# Altium PCB WCH_TOUCH_Kit_EX001.PcbDoc
Units mil, origin at the board's own origin, x right, y up, seen from the top; angles counter-clockwise.
Board outline 2599.76 x 3002.87 mil, 2 copper layers (Top Layer, Bottom Layer); 30 components, 23 nets, 94 pads, 43 vias.
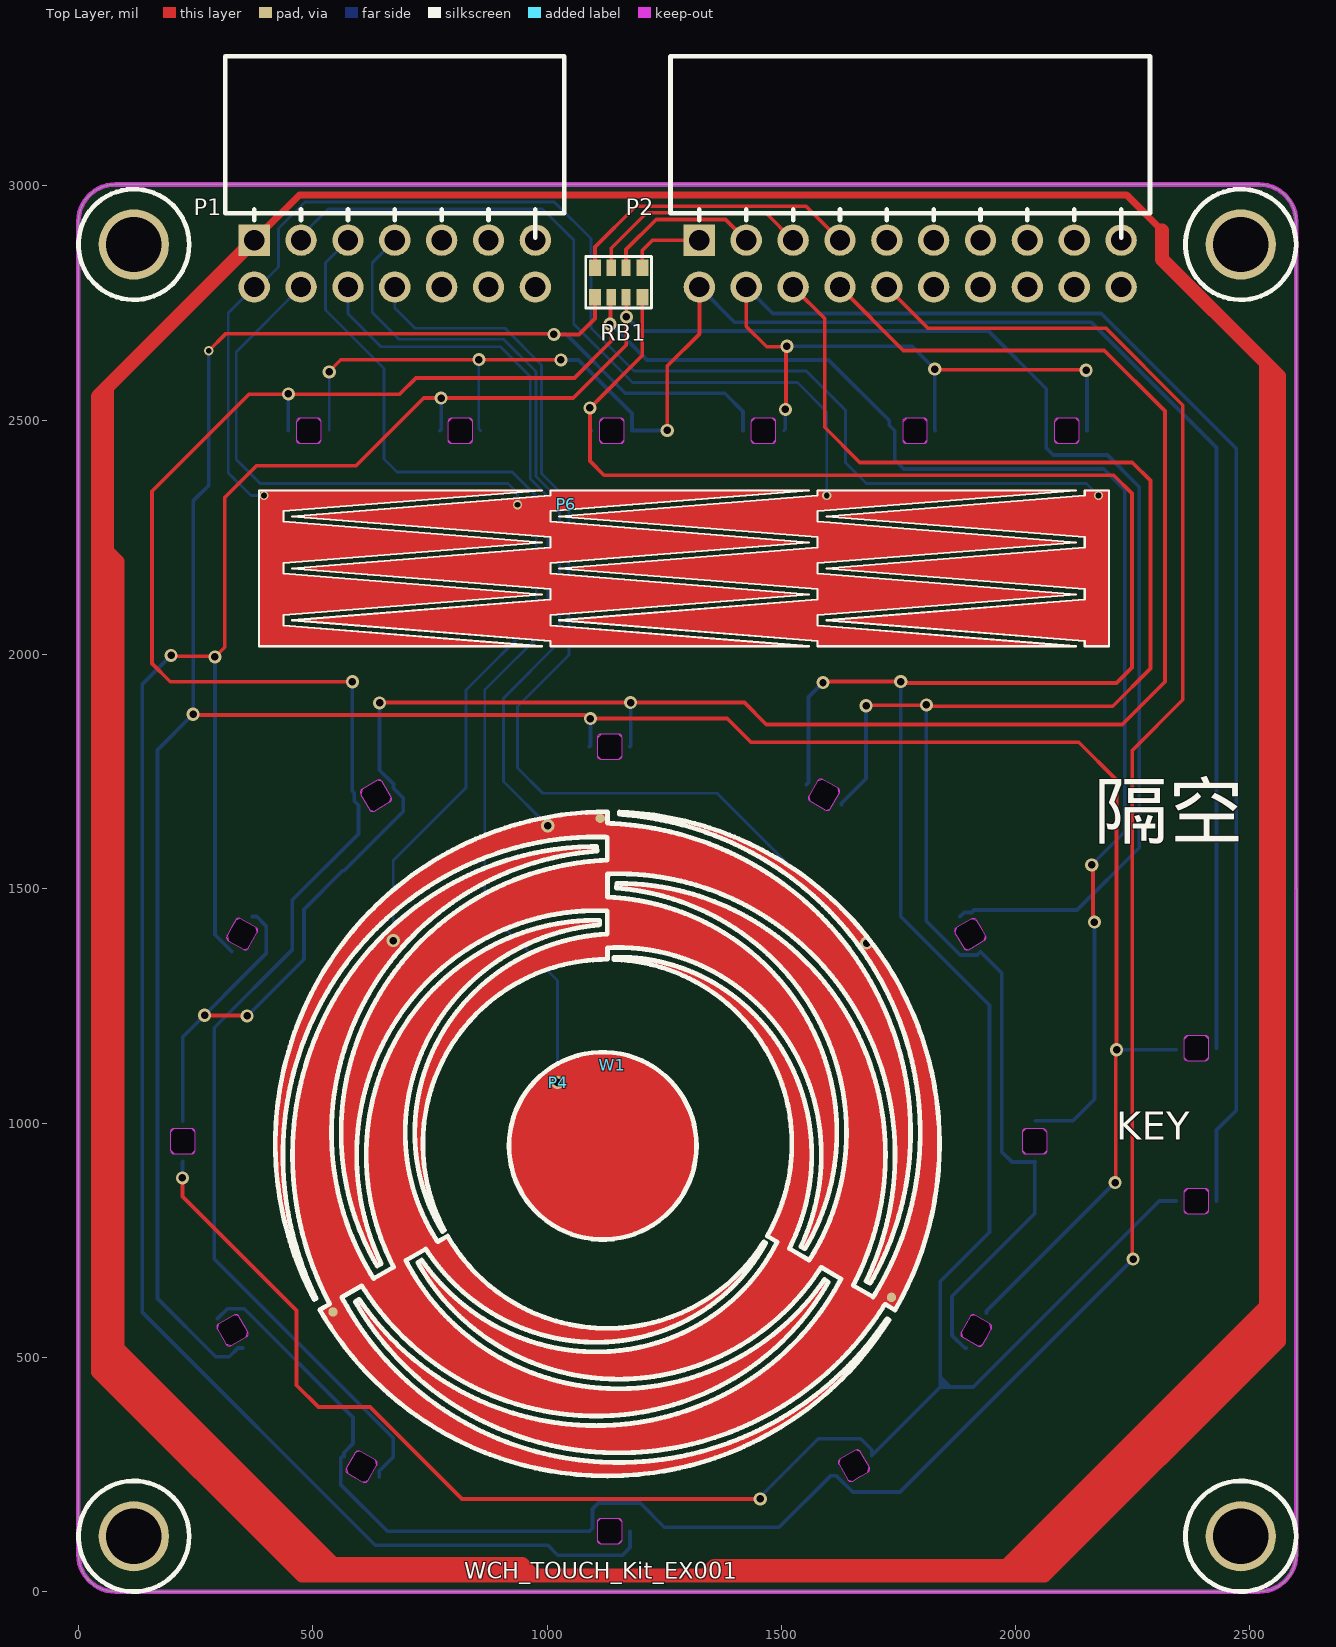
[diagram p0: Top Layer view]
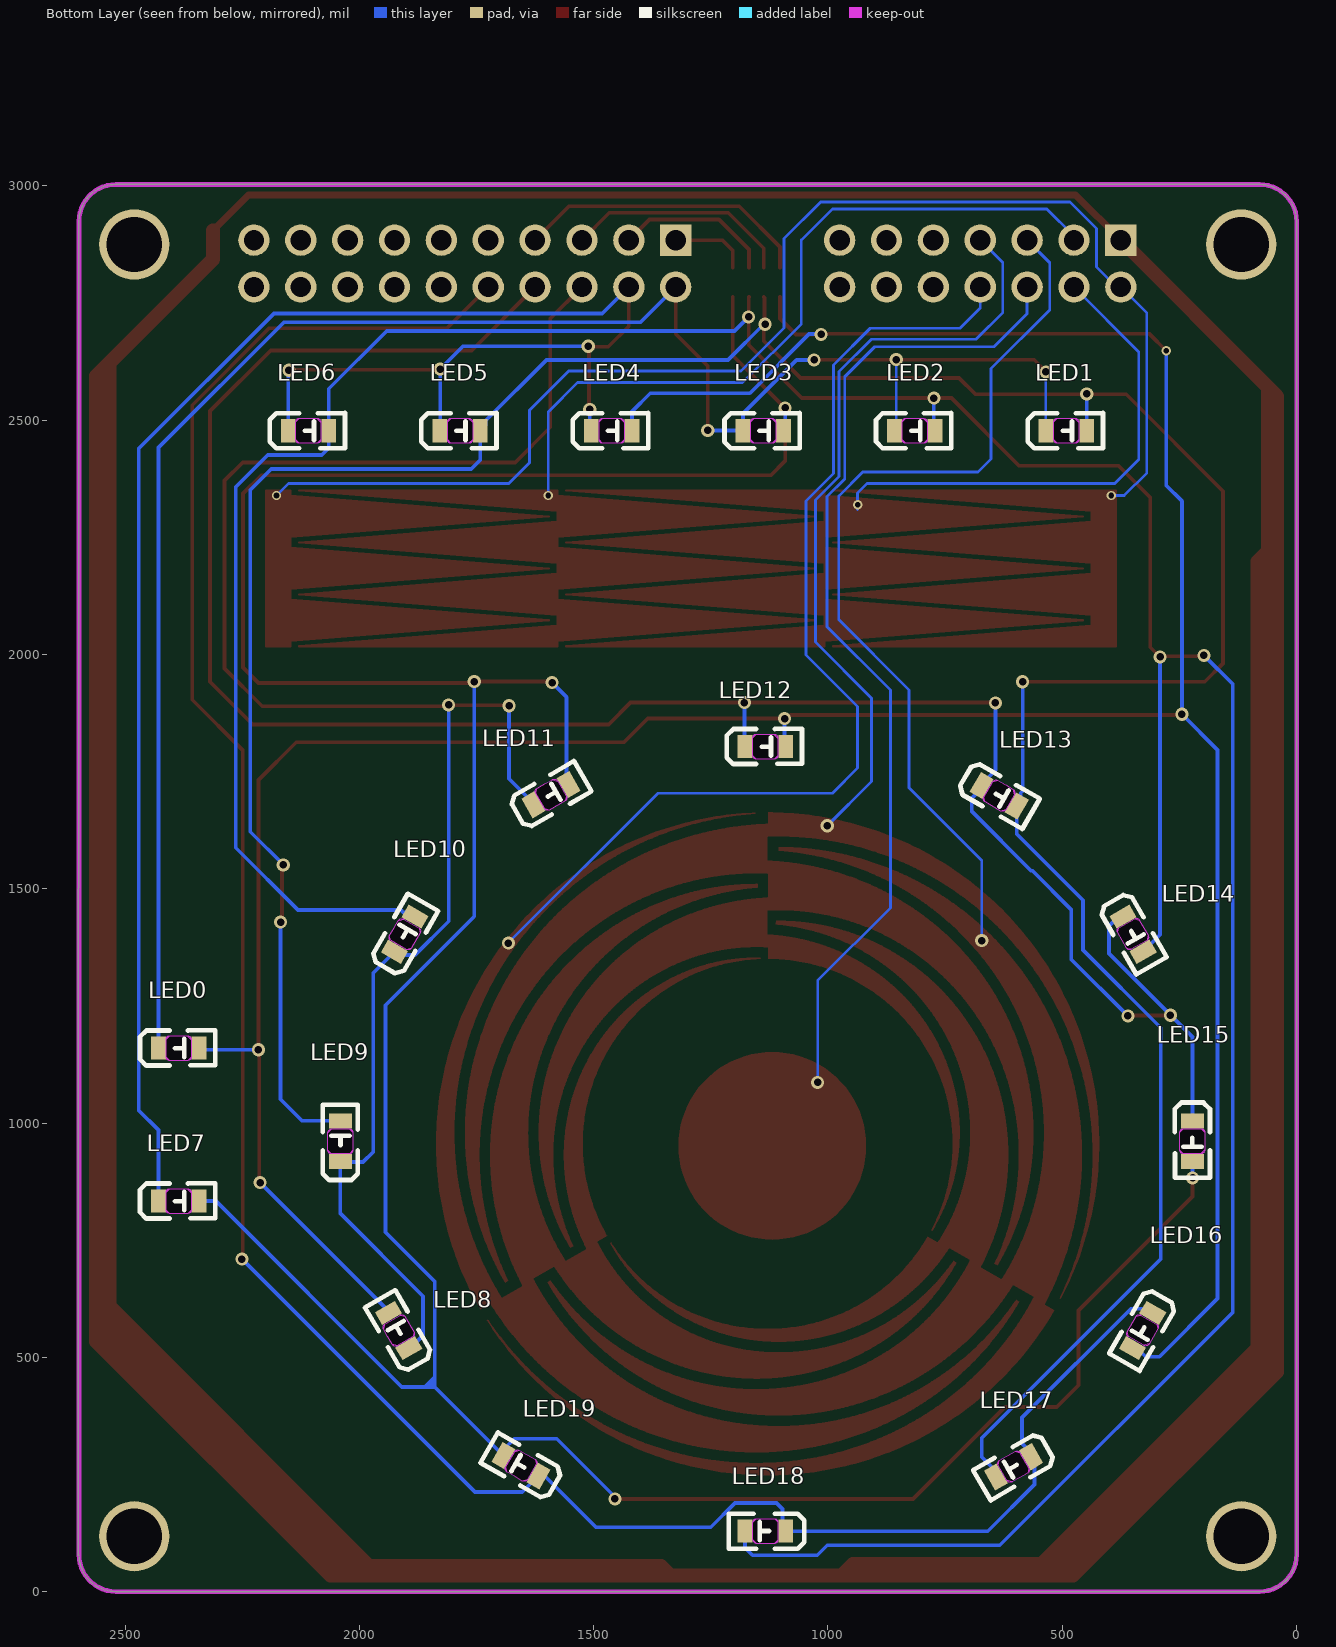
[diagram p1: Bottom Layer view, seen from below]

## Layer stack, top to bottom
Top Solder: solder mask 0.4, Solder Resist, Dk 3.5
Top Layer: signal copper 1.4
Dielectric 1: dielectric 12.6, FR-4, Dk 4.8
Bottom Layer: signal copper 1.4
Bottom Solder: solder mask 0.4, Solder Resist, Dk 3.5

## Board outline
-0.19,79.06 -0.01,2924.06 0,2924.13 cw(c78.74,2924.13) 78.74,3002.87 2519.68,3002.87 cw(c2519.68,2924.13) 2598.43,2924.13 2598.52,2924.06 2599.57,76.76 2598.43,78.74 cw(c2519.68,78.74) 2519.68,0 78.74,0 cw(c78.74,78.74)

## Design rules (kind name [scope] priority, off if disabled: settings)
Clearance Clearance_1 [InPolygon] p1: gap=10 ignorepadtopadclearanceinfootprint=FALSE
Clearance [All] p2: gap=6 ignorepadtopadclearanceinfootprint=FALSE except(5: Fill-Fill Fill-Poly Fill-Region Poly-Poly Poly-Region Region-Region; 8: Arc-Via Track-Via SMDPad-Via THPad-Via Via-Via Via-Fill Via-Poly Via-Region Via-Hole)
ComponentClearance [All] p1 off: gap=10 collisioncheckmode=3 verticalgap=10 showdistances=FALSE
DiffPairsRouting [All] p1: maxlimit=10 minlimit=7 mostfreqgap=8 toplayer_minwidth=6 toplayer_maxwidth=15 toplayer_prefwidth=8 bottomlayer_minwidth=6 bottomlayer_maxwidth=15 bottomlayer_prefwidth=8 maxuncoupledlength=500
MinimumSolderMaskSliver [All] p1 off: minsoldermaskwidth=10
PolygonConnect PolygonConnect_1 [IsVia] p1: connectstyle=Direct reliefconductorwidth=10 reliefentries=4 polygonreliefangle="90 Angle" airgapwidth=10
PolygonConnect [All] p2: connectstyle=Relief reliefconductorwidth=20 reliefentries=4 polygonreliefangle="90 Angle" airgapwidth=10
RoutingVias [All] p1: holewidth=16 width=28 viastyle="Through Hole" minholewidth=12 minwidth=20 maxholewidth=28 maxwidth=50
SilkToSilkClearance [All] p1 off: silktosilkclearance=10
SilkToSolderMaskClearance [IsPad] p1 off: minsilkscreentomaskgap=10 clearancetoexposedcopper=TRUE
SolderMaskExpansion [All] p1: expansion=2 istentingtop=FALSE
Width [All] p1: maxlimit=100 minlimit=4.44 preferedwidth=10
25 further rules are at their usual default settings.

## Classes and differential pairs
component class WCH_TOUCH_Kit_EX001: LED0 LED1 LED2 LED3 LED4 LED5 LED6 LED7 LED8 LED9 LED10 LED11 LED12 LED13 LED14 LED15 LED16 LED17 LED18 LED19 P1 P2 P4 P6 RB1 W1

## Components (designator, comment, footprint, x,y, rotation, side; value= is the part's Value field where it differs from the comment)
LED0 "" LED0805-RD_EH 2385.46,1159.95 r180 bottom
LED1 "" LED0805-RD_EH 491.18,2477.28 r180 bottom
LED2 "" LED0805-RD_EH 814.67,2477.28 r180 bottom
LED3 "" LED0805-RD_EH 1138.16,2477.28 r180 bottom
LED4 "" LED0805-RD_EH 1461.64,2477.28 r180 bottom
LED5 "" LED0805-RD_EH 1785.13,2477.28 r180 bottom
LED6 "" LED0805-RD_EH 2108.62,2477.28 r180 bottom
LED7 "" LED0805-RD_EH 2385.46,833.47 r180 bottom
LED8 "" LED0805-RD_EH 1916.17,557.27 r60 bottom
LED9 "" LED0805-RD_EH 2040.56,960.98 r90 bottom
LED10 "" LED0805-RD_EH 1903.05,1403.04 r120 bottom
LED11 "" LED0805-RD_EH 1590.9,1700.76 r150 bottom
LED12 "" LED0805-RD_EH 1133.51,1803.33 r180 bottom
LED13 "" LED0805-RD_EH 634.49,1698.39 r210 bottom
LED14 "" LED0805-RD_EH 348.94,1403.04 r240 bottom
LED15 "" LED0805-RD_EH 222.31,960.98 r270 bottom
LED16 "" LED0805-RD_EH 328.58,557.27 r300 bottom
LED17 "" LED0805-RD_EH 604.09,266.27 r330 bottom
LED18 "" LED0805-RD_EH 1133.51,128.97 r0 bottom
LED19 "" LED0805-RD_EH 1655.26,268.64 r30 bottom
P1 "Header 7X2" HDR-TH_14P-P2.54-H-F-R2-C10-W8.5 375,2884.02 r0 top
P2 "Header 10X2" HDR-TH_20P-P2.54-H-F-R2-C10-W8.5 1325,2884.02 r0 top
P4 "key" key 1118.83,951.31 r0 top
P6 "LineSlider" SLIDER_4_46X8.5 393.16,2345.84 r0 top
RB1 "RB-8P4R" RCA-8P4R-0603 1152.7,2794.05 r180 top
W1 "WheelSlider" 滑轮10-18-3 48033.91,49966.12 r0 top locked
? "Comment" HOLE 118.11,2874.76 r0 top
? "Comment" HOLE 2480.31,118.11 r0 top
? "Comment" HOLE 2480.31,2874.76 r0 top
? "Comment" HOLE 118.11,118.11 r0 top

## Footprints (in the part's own frame and the unit in brackets; to place one, negate y for a bottom-side part, rotate by r counter-clockwise, add the part's x,y. Pads: shape width x height; smd on the part's side, far side on the other; paste and mask are expansions set on the pad)
HDR-TH_14P-P2.54-H-F-R2-C10-W8.5 [mm]
  rect 1.7x1.7 hole 1.1 paste+0 mask+0.05: 1(0,0)
  round 1.7 hole 1.1 paste+0 mask+0.05: 2(0,-2.54) 3(2.54,0) 4(2.54,-2.54) 5(5.08,0) 6(5.08,-2.54) 7(7.62,0) 8(7.62,-2.54) 9(10.16,0) 10(10.16,-2.54) 11(12.7,0) 12(12.7,-2.54) 13(15.24,0) 14(15.24,-2.54)
  silkscreen extent -1.57,0.13 16.81,9.96
HDR-TH_20P-P2.54-H-F-R2-C10-W8.5 [mm]
  rect 1.7x1.7 hole 1.1 paste+0 mask+0.05: 1(0,0)
  round 1.7 hole 1.1 paste+0 mask+0.05: 2(0,-2.54) 3(2.54,0) 4(2.54,-2.54) 5(5.08,0) 6(5.08,-2.54) 7(7.62,0) 8(7.62,-2.54) 9(10.16,0) 10(10.16,-2.54) 11(12.7,0) 12(12.7,-2.54) 13(15.24,0) 14(15.24,-2.54) 15(17.78,0) 16(17.78,-2.54) 17(20.32,0) 18(20.32,-2.54) 19(22.86,0) 20(22.86,-2.54)
  silkscreen extent -1.57,0.13 24.43,9.96
HOLE [mm]
  round 3.81 hole 3: 0(0,0)
  silkscreen extent -3,-3 3,3
key [mil]
  rect 1x1 smd mask+0: 1(-95,135)
  Top Layer region: -200,0 -184.78,-76.54 -141.42,-141.42 -76.54,-184.78 0,-200 0,-200 76.54,-184.78 141.42,-141.42 184.78,-76.54 200,0 200,0 184.78,76.54 141.42,141.42 76.54,184.78 0,200 0,200 -76.54,184.78 -141.42,141.42 -184.78,76.54 -200,0
  silkscreen extent -200,-200 200,200
LED0805-RD_EH [mm]
  rect 0.8x1.25 smd: 1(1.1,0) 2(-1.1,0)
  Keep-Out Layer board cut-out: 0.004,0.675 0.457,0.675 0.541,0.658 0.612,0.611 0.659,0.54 0.676,0.456 0.676,0.456 0.676,-0.487 0.661,-0.56 0.62,-0.621 0.558,-0.663 0.485,-0.677 0.485,-0.677 -0.496,-0.677 -0.565,-0.664 -0.623,-0.625 -0.662,-0.566 -0.676,-0.498 -0.676,-0.498 -0.676,0.489 -0.661,0.561 -0.621,0.622 -0.559,0.663 -0.487,0.677 -0.487,0.677
  Multi-Layer keep-out region: 0.004,0.675 0.457,0.675 0.676,0.456 0.676,-0.487 0.485,-0.677 -0.496,-0.677 -0.676,-0.498 -0.676,0.489 -0.487,0.677
  silkscreen extent -2.1,-0.95 1.98,0.96
RCA-8P4R-0603 [mm]
  rect 0.65x0.9 smd mask+0.051: 1(-1.28,-0.8) 4(1.28,-0.8) 5(1.28,0.8) 8(-1.28,0.8)
  rect 0.5x0.9 smd mask+0.051: 2(-0.4,-0.8) 3(0.4,-0.8) 6(0.4,0.8) 7(-0.4,0.8)
  silkscreen extent -1.78,-1.4 1.78,1.4, body extent -1.6,-0.8 1.6,0.8, height 0.6
SLIDER_4_46X8.5 [mil]
  rect 1x1 smd mask+0: 1(0,0) 2(116.87,-49.97) 3(692.44,-51.39) 4(1296.19,-48.09)
  Top Layer region: 44.06,-40.11 44.06,-62.29 595.65,-106.66 44.06,-151.02 44.06,-173.2 595.65,-217.57 44.06,-261.93 44.06,-284.11 595.65,-328.48 -7.69,-328.48 -7.69,4.25 595.65,4.25
  Top Layer region: 614.14,-40.11 614.14,-62.29 1165.72,-106.66 614.14,-151.02 614.14,-173.2 1165.72,-217.57 614.14,-261.93 614.14,-284.11 1165.72,-328.48 614.14,-328.48 614.14,-317.38 62.55,-273.02 614.14,-228.66 614.14,-206.48 62.55,-162.11 614.14,-117.75 614.14,-95.57 62.55,-51.2 614.14,-6.84 614.14,4.25 1165.72,4.25
  Top Layer region: 1184.21,-40.11 1184.21,-62.29 1735.79,-106.66 1184.21,-151.02 1184.21,-173.2 1735.79,-217.57 1184.21,-261.93 1184.21,-284.11 1735.79,-328.48 1184.21,-328.48 1184.21,-317.38 632.62,-273.02 1184.21,-228.66 1184.21,-206.48 632.62,-162.11 1184.21,-117.75 1184.21,-95.57 632.62,-51.2 1184.21,-6.84 1184.21,4.25 1735.79,4.25
  Top Layer region: 1806.04,-328.48 1754.28,-328.48 1754.28,-317.38 1202.69,-273.02 1754.28,-228.66 1754.28,-206.48 1202.69,-162.11 1754.28,-117.75 1754.28,-95.57 1202.69,-51.2 1754.28,-6.84 1754.28,4.25 1806.04,4.25
  Top Layer lines w4.44: -7.69,-328.48 -7.69,4.25 595.65,4.25 44.06,-40.11 44.06,-62.29 595.65,-106.66 44.06,-151.02 44.06,-173.2 595.65,-217.57 44.06,-261.93 44.06,-284.11 595.65,-328.48 -7.69,-328.48 ; 62.55,-273.02 614.14,-317.38 614.14,-328.48 1165.72,-328.48 614.14,-284.11 614.14,-261.93 1165.72,-217.57 614.14,-173.2 614.14,-151.02 1165.72,-106.66 614.14,-62.29 614.14,-40.11 1165.72,4.25 614.14,4.25 614.14,-6.84 62.55,-51.2 614.14,-95.57 614.14,-117.75 62.55,-162.11 614.14,-206.48 614.14,-228.66 62.55,-273.02 ; 632.62,-273.02 1184.21,-228.66 1184.21,-206.48 632.62,-162.11 1184.21,-117.75 1184.21,-95.57 632.62,-51.2 1184.21,-6.84 1184.21,4.25 1735.79,4.25 1184.21,-40.11 1184.21,-62.29 1735.79,-106.66 1184.21,-151.02 1184.21,-173.2 1735.79,-217.57 1184.21,-261.93 1184.21,-284.11 1735.79,-328.48 1184.21,-328.48 1184.21,-317.38 632.62,-273.02 ; 1202.69,-273.02 1754.28,-317.38 1754.28,-328.48 1806.04,-328.48 1806.04,4.25 1754.28,4.25 1754.28,-6.84 1202.69,-51.2 1754.28,-95.57 1754.28,-117.75 1202.69,-162.11 1754.28,-206.48 1754.28,-228.66 1202.69,-273.02
  silkscreen extent -8,-328 1806,4
滑轮10-18-3 [mil]
  round 20 smd paste+0: 1(-46920.53,-48316) 2(-46299.03,-49338.11) 3(-47490.91,-49369.25)
  Top Layer region: 7194 vertices and 0 holes, not listed, extent -47441.67,-49668.76 -46197.79,-48303.7
  Top Layer region: 7199 vertices and 0 holes, not listed, extent -47575.87,-49717.96 -46306.17,-48377.41
  Top Layer region: 7206 vertices and 0 holes, not listed, extent -47612.57,-49341.21 -46259.5,-48303.2
  silkscreen extent -47614,-49719 -46197,-48302

## Part data
LED0 LED1 LED2 LED3 LED4 LED5 LED6 LED7 LED8 LED9 LED10 LED11 LED12 LED13 LED14 LED15 LED16 LED17 LED18 LED19: library part LED3, "Typical BLUE SiC LED", DatasheetVersion=16-Apr-2002, LatestRevisionDate=17-Dec-2003, LatestRevisionNote="PCB Footprint replaced.", PackageDescription="SM LED; 2 C-Bend Leads; Body 3.5 x 2.8 x 1.9 mm, inc leads (LxWxH typ)", PackageReference=3.5X2.8X1.9, PackageVersion=16-Apr-2002, Published=8-Jun-2000, Publisher="Altium Limited"
P1: "Header, 7-Pin, Dual row", LatestRevisionDate=17-Jul-2002, LatestRevisionNote="Re-released for DXP Platform.", Publisher="Altium Limited"
P2: "Header, 10-Pin, Dual row", LatestRevisionDate=17-Jul-2002, LatestRevisionNote="Re-released for DXP Platform.", Publisher="Altium Limited"
P4: library part "HEADER 1", "Header, 1-Pin"
P6: library part "HEADER 4", "Header, 4-Pin"
RB1: "贴片网络排阻"
W1: library part "HEADER 3", "Header, 3-Pin"

## Via types
v1: diameter 28, hole 16, Top Layer to Bottom Layer, tented both sides, 38 vias
v2: diameter 20, hole 12, Top Layer to Bottom Layer, tented both sides, 5 vias

## Nets (pads, with @x,y where several pads share a name; then routed paths per layer and width w, separated by ;. In a path a pad name is that pad's centre, name@x,y a point inside that pad or via, vN(x,y) a via of type N, cw(c..) or ccw(c..) an arc to the next point about the centre after c; other vN are vias at no path point)
3V3: P2.19
COM1: LED0.2 LED1.2 LED2.2 LED3.2 P2.2 | length 3955.1
  Top Layer w8: v1@535.06,2604.19 559.79,2628.92 v1(854.34,2628.92) 854.58,2628.69 1029.42,2628.69 v1(1029.66,2628.45) ; v1(1256.5,2477.87) 1256.5,2615.53 1325,2684.02 P2.2
  Bottom Layer w6: LED1.2@535.06,2478.82 v1(535.06,2603.01) ; v1(854.34,2628.92) 854.34,2480.91 LED2.2
  Bottom Layer w8: v1(1029.66,2628.45) 1066.84,2628.45 1181.46,2513.83 LED3.2 1182.06,2477.87 v1(1256.5,2477.87) ; P2.2 1400.43,2708.6 2161.5,2708.6 2428.76,2441.33 2428.76,1219.95 LED0.2
COM2: LED4.2 LED5.2 LED6.2 LED7.2 P2.4 | length 4104
  Top Layer w8: P2.4 1425,2700.03 1468.65,2656.38 v1@1510.45,2656.38 ; v1(1508.43,2522.67) 1510.03,2524.27 1510.03,2655.96 v1@1510.45,2656.38 ; v1(1511.63,2657.56) v1@1510.45,2656.38 ; v1(1827.28,2608.98) 1828.59,2607.67 2148.92,2607.67 v1(2150.23,2606.36)
  Bottom Layer w6: LED4.2 LED4.2@1506.39,2478.71
  Bottom Layer w7: LED4.2@1506.39,2478.71 1508.43,2480.75 v1(1508.43,2522.67)
  Bottom Layer w8: P2.4 1481.5,2727.53 2182.41,2727.53 2470.66,2439.28 2470.66,1026.79 2428.76,984.89 LED7.2 ; v1(1511.63,2657.56) 1778.7,2657.56 v1(1827.28,2608.98) 1827.28,2478.43 LED5.2 ; v1(2150.23,2606.36) 2151.92,2604.67 LED6.2
COM3: LED8.2 LED9.2 LED10.2 LED11.2 P2.6 | length 3963
  Top Layer w8: P2.6 1592.44,2716.58 1592.44,2484.66 1667.35,2409.75 2248.82,2409.75 2287.65,2370.92 2287.65,1969.88 2207.23,1889.46 1812.02,1889.46 v1(1809.39,1892.09) 1808.59,1891.29 1681.37,1891.29 v1(1680.57,1890.5)
  Bottom Layer w8: LED11.2 1628.4,1682.34 1680.57,1734.51 v1(1680.57,1890.5) ; v1(1809.39,1892.09) 1809.39,1430.65 1881.56,1358.48 1917.64,1358.48 LED10.2 ; LED8.2 1891.27,519.76 1864.33,546.71 1864.33,630.43 2040.56,806.67 LED9.2@2040.56,916.75 ; LED10.2@1927.62,1362.91 1970.4,1320.13 1970.4,938.31 1991.95,916.75 LED9.2@2040.56,916.75 ; LED9.2 LED9.2@2040.56,916.75 ; LED9.2@2041.48,916.75 LED9.2@2040.56,916.75
COM4: LED12.2 LED13.2 LED14.2 LED15.2 P2.8 | length 4657
  Top Layer w8: v1(269.16,1229.9) 269.89,1229.16 359.26,1229.16 v1(359.99,1228.43) ; v1(642.52,1896.61) 643.06,1897.15 v1(1178.28,1897.15) 1421.22,1897.15 1467.73,1850.64 2227.33,1850.64 2318.54,1941.85 2318.54,2519.38 2189.17,2648.75 1830.26,2648.75 1760.27,2648.75 P2.8
  Bottom Layer w8: LED15.2 222.31,1183.5 400.46,1361.65 400.46,1420.68 380.59,1440.54 LED14.2 ; v1(359.99,1228.43) 481.03,1349.47 481.03,1455.89 563.61,1538.47 566.87,1538.47 692.91,1664.51 692.91,1693.65 672,1714.56 LED13.2 672,1723.28 642.52,1752.76 v1(642.52,1896.61) ; LED12.2 1178.28,1804.79 v1(1178.28,1897.15)
COM5: LED16.2 LED17.2 LED18.2 LED19.2 P2.10 | length 5222
  Top Layer w8: P2.10 1813.02,2696 1905.02,2696 2192.58,2696 2356.67,2531.91 2356.67,1903.04 2248.58,1794.95 2248.58,711.42 v1(2250.52,709.48)
  Bottom Layer w8: LED16.2@296.91,582.66 317.99,603.74 353.55,603.74 585.95,371.34 585.95,315.87 566.59,296.51 LED17.2 ; LED17.2@565.52,290.69 559.44,284.61 559.44,228.74 659.2,128.97 LED18.2 1096.91,135.67 1096.91,176.12 1109.64,188.85 1198.6,188.85 1250.1,137.35 1494.89,137.35 1604.53,246.99 LED19.2 1652.45,212.3 1753.34,212.3 v1(2250.52,709.48)
GND: P2.20
SEG0: P2.7 RB1.4 | length 632.5
  Top Layer w8: RB1.4 1102.31,2869.44 1189.16,2956.29 1552.73,2956.29 P2.7
SEG1: P2.5 RB1.3 | length 484.6
  Top Layer w8: RB1.3 1136.95,2866.55 1212.7,2942.29 1466.73,2942.29 P2.5
SEG2: P2.3 RB1.2 | length 339.9
  Top Layer w8: RB1.2 1168.45,2863.91 1232.83,2928.29 1380.73,2928.29 P2.3
SEG3: P2.1 RB1.1 | length 167.6
  Top Layer w8: RB1.1 1203.1,2862.15 1224.97,2884.02 P2.1
SEG_0: LED0.1 LED4.1 LED8.1 LED12.1 LED16.1 RB1.5 | length 7190.5
  Top Layer w8: v1(244.68,1872.28) 246.35,1870.61 1079.65,1870.61 1087.22,1863.04 v1(1092.63,1863.04) 1384.54,1863.04 1435.13,1812.45 2134.68,1812.45 2215.38,1731.75 v1(2215.38,1156.31) 2213.69,1154.61 2213.69,874.63 v1(2211.99,872.93) ; v2(277.88,2648.17) 313.78,2684.06 1013.16,2684.06 v1(1014.46,2682.76) 1068.08,2682.76 1102.31,2717 RB1.5
  Bottom Layer w8: v2(277.88,2648.17) 277.88,2360.3 244.68,2327.09 v1(244.68,1872.28) 168.52,1796.12 168.52,625.33 292.76,501.09 321.61,501.09 340.29,519.76 LED16.1 ; v1(1014.46,2682.76) 1015.18,2683.48 1040.31,2683.48 1166.63,2557.16 1379.32,2557.16 1418.34,2518.14 LED4.1 ; LED12.1 1092.63,1805.75 v1(1092.63,1863.04) ; LED8.1 1937.82,598.76 v1(2211.99,872.93) ; v1(2215.38,1156.31) LED0.1@2342.15,1156.31
SEG_1: LED1.1 LED5.1 LED9.1 LED13.1 LED17.1 RB1.6 | length 6864
  Top Layer w8: v1(584.47,1941.74) 195.78,1941.74 156.96,1980.56 156.96,2348.39 363.59,2555.02 685.24,2555.02 720.17,2589.95 1058.35,2589.95 1137.09,2668.69 1137.09,2701.43 v1(1134.09,2704.43) 1135.52,2705.86 1135.52,2761.12 RB1.6 ; v1(2162.29,1550.96) 2165.21,1548.04 2165.21,1431.85 v1(2168.13,1428.93)
  Bottom Layer w8: v1(447.84,2555.74) 447.84,2477.31 LED1.1 ; v1(584.47,1941.74) 584.47,1708.75 588.45,1704.77 588.45,1686.94 597.31,1678.08 597.31,1616.71 455.94,1475.33 455.94,1369.42 289.8,1203.29 289.8,709.8 671.79,327.82 671.79,286.99 641.59,256.79 LED17.1 ; v1(1134.09,2704.43) 1137,2704.43 1213.12,2628.31 1600.7,2628.31 1730.08,2498.93 1730.08,2489.02 LED5.1 1741.83,2414.94 1761.16,2395.61 2188.09,2395.61 2232.8,2350.9 2232.8,1621.69 v1@2162.18,1551.07 ; LED9.1@2041.73,1004.99 2122.3,1004.99 2168.13,1050.82 v1(2168.13,1428.93)
SEG_2: LED2.1 LED6.1 LED10.1 LED14.1 LED18.1 RB1.7 | length 7509.1
  Top Layer w8: v1(197.62,1997.92) 199.31,1996.22 289.56,1996.22 v1(291.26,1994.52) 312.14,2015.4 312.14,2334.86 379.74,2402.46 592.08,2402.46 736.61,2546.99 v1(773.99,2546.99) 1055.81,2546.99 1168.89,2660.07 1168.89,2762.11 RB1.7
  Bottom Layer w8: v1(197.62,1997.92) 136.29,1936.59 136.29,595.74 633.24,98.79 1001.66,98.79 1022.69,77.75 1160.72,77.75 1176.82,93.85 LED18.1 ; v1(291.26,1994.52) 291.26,1401.57 LED14.1 ; LED2.1 773.99,2479.9 v1(773.99,2546.99) ; v1(1169.34,2720.27) 1199.29,2690.32 1941.73,2690.32 2065.31,2566.73 LED6.1 2065.31,2440.27 2080.18,2425.4 2195.64,2425.4 2263.66,2357.38 2263.66,1587.51 2130.68,1454.53 1911.27,1454.53 1906.2,1449.46 1890.32,1449.46 LED10.1
SEG_3: LED3.1 LED7.1 LED11.1 LED15.1 LED19.1 RB1.8 | length 7442.3
  Top Layer w8: v1(221.92,883.03) 221.92,843.42 465.29,600.04 465.29,440.48 511.95,393.83 622.05,393.83 818.25,197.63 v1(1454.81,197.63) ; RB1.8 1203.1,2637.59 v1(1091.4,2525.89) 1091.4,2412.54 1121.72,2382.22 2209.27,2382.22 2248.23,2343.26 2248.23,1971.97 2215.12,1938.85 1757.83,1938.85 v1(1754.69,1941.99) 1591,1941.99 v1(1588.8,1939.79)
  Bottom Layer w8: v1(221.92,883.03) 221.92,917.28 LED15.1 ; v1(1091.4,2525.89) 1091.4,2480.72 LED3.1 ; v1(1454.81,197.63) 1454.81,202.25 1578.79,326.23 1669.16,326.23 1692.76,302.63 LED19.1 1839.18,436.72 ; LED11.1 1557.83,1726.83 1557.83,1908.82 v1(1588.8,1939.79) ; v1(1754.69,1941.99) 1754.69,1440.95 1944.17,1251.48 1944.17,766.86 1839.18,661.87 1839.18,465.22 1839.18,457.98 ; LED7.1 2306.2,833.47 1909.45,436.72 1860.44,436.72 ; 1839.18,436.72 1850.34,436.72 ; 1839.18,436.72 1839.18,447.88 ; 1839.18,447.88 1839.18,457.98 ; 1839.18,447.88 1850.34,436.72 ; 1839.18,457.98 1860.44,436.72 ; 1850.34,436.72 1860.44,436.72
TS0: P1.1 | length 21337.6
  Top Layer w15: P1.1 471.49,2980.51 2236.91,2980.51 2312.55,2904.87
  Top Layer w30: 72.71,2581.74 60.4,2569.42 ; P1.1 60.4,2569.42 ; 2312.55,2904.87 2312.55,2843.32 2533.77,2622.09 ; 2533.77,622.74 2533.77,608.93 ; 41.8,498.22 41.8,525.11 ; 41.8,498.22 505.95,34.06 ; 41.8,498.22 41.8,469.06 476.8,34.06 505.95,34.06 ; 41.8,525.11 41.8,560.31 ; 41.8,525.11 82.85,484.06 ; 41.8,560.31 41.8,2550.82 60.4,2569.42 ; 41.8,560.31 60.4,541.72 ; 60.4,541.72 60.4,2220.66 ; 60.4,541.72 82.85,519.26 ; 60.4,2220.66 60.4,2569.42 ; 60.4,2220.66 82.85,2198.2 82.85,519.26 ; 82.85,484.06 532.85,34.06 ; 82.85,484.06 82.85,519.26 ; 82.85,519.26 543.72,58.39 ; 505.95,34.06 532.85,34.06 ; 532.85,34.06 568.05,34.06 ; 543.72,58.39 568.05,34.06 ; 543.72,58.39 946.95,58.39 971.27,34.06 ; 568.05,34.06 971.27,34.06 ; 971.27,34.06 1336.42,34.06 ; 1336.42,34.06 2061.8,34.06 2082.12,54.38 ; 1336.42,34.06 1356.74,54.38 1979.22,54.38 ; 1979.22,54.38 2020.32,54.38 ; 1979.22,54.38 2533.77,608.93 ; 2020.32,54.38 2533.77,567.83 ; 2020.32,54.38 2055.54,54.38 ; 2055.54,54.38 2533.77,532.6 ; 2055.54,54.38 2082.12,54.38 ; 2082.12,54.38 2533.77,506.03 ; 2533.77,506.03 2561.8,534.06 2561.8,2594.06 2533.77,2622.09 ; 2533.77,506.03 2533.77,532.6 ; 2533.77,532.6 2533.77,567.83 ; 2533.77,567.83 2533.77,608.93 ; 2533.77,608.93 2533.77,2622.09
TS1: P1.2 P6.1 P6.4 | length 2877.9
  Bottom Layer w6: v2(395.8,2339.06) 367.9,2339.06 319.53,2387.43 319.53,2728.55 P1.2 384.15,2784.02 426.8,2826.67 426.8,2909.06 483.3,2965.56 1015.3,2965.56 1093.47,2887.39 1093.47,2696.85 1185.51,2604.81 1553.04,2604.81 1636.8,2521.05 1636.8,2409.06 1681.25,2364.61 2151.25,2364.61 v2(2176.8,2339.06)
TS2: P1.3 P6.3 | length 1617
  Bottom Layer w6: P1.3 475,2892.53 533.03,2950.56 990.35,2950.56 1056.8,2884.11 1056.8,2705.27 1182.06,2580.01 1534.34,2580.01 1596.8,2517.55 v2(1596.8,2339.06)
TS3: P1.4 P6.2 | length 1090.4
  Bottom Layer w6: P1.4 336.66,2645.69 336.66,2415.71 387.98,2364.39 916.47,2364.39 936.8,2344.06 v2(936.8,2319.06) 936.8,2309.06
TS4: P1.5 W1.3 | length 1971.8
  Bottom Layer w6: P1.5 526.8,2835.82 526.8,2735.24 652.02,2610.02 652.02,2416.73 679.68,2389.07 925.78,2389.07 976.8,2338.05 976.8,2074.06 826.8,1924.06 826.8,1715.33 671.8,1560.33 v1(671.8,1389.06)
TS5: P1.6 P4.1 | length 2143.8
  Bottom Layer w6: P1.6 575,2726.86 645.37,2656.49 900.24,2656.49 964.25,2592.48 964.25,2374.7 1001.8,2337.14 1001.8,2059.06 866.8,1924.06 866.8,1459.06 1021.94,1303.92 v1(1021.94,1086.53)
TS6: P1.7 W1.1 | length 1654.7
  Bottom Layer w6: P1.7 626.8,2835.82 626.8,2729.99 684.17,2672.62 907.01,2672.62 976.25,2603.38 976.25,2379.67 1026.8,2329.11 1026.8,2026.56 906.8,1906.56 906.8,1729.06 v1(1001.44,1634.42)
TS7: P1.8 W1.2 | length 2238.6
  Bottom Layer w6: P1.8 675,2738.95 717.88,2696.07 909.79,2696.07 988.25,2617.62 988.25,2385.97 1046.8,2327.42 1046.8,1999.06 936.8,1889.06 936.8,1757.58 990.67,1703.71 1362.95,1703.71 1681.8,1384.86 v1(1681.8,1384.06)
pads on no net: ?.0 P1.9 P1.10 P1.11 P1.12 P1.13 P1.14 P2.9 P2.11 P2.12 P2.13 P2.14 P2.15 P2.16 P2.17 P2.18

## Keep-outs
Keep-Out Layer:
  lines w10: -0.19,78.93 ccw(c78.74,78.93) 78.74,0 2519.68,0 ccw(c2519.68,78.74) 2598.43,78.74 2598.43,2924.13 ccw(c2519.68,2924.13) 2519.68,3002.87 78.74,3002.87 ccw(c78.74,2923.94) -0.19,2923.94 -0.19,78.93

## Silkscreen, mask and mechanical layers (free items; w line width, h text height)
Top Overlay:
  text "隔空" at 2167.04,1570.91 h200
  text "KEY" at 2214.33,964.06 h60
  text "WCH_TOUCH_Kit_EX001" at 823.42,27.84 h35
Mechanical 1:
  lines w10: -0.19,79.06 -0.01,2924.06 ; 0,78.74 ccw(c78.74,78.74) 78.74,0 2519.68,0 ccw(c2519.68,78.74) 2598.43,78.74 ; 0,2924.13 cw(c78.74,2924.13) 78.74,3002.87 2519.68,3002.87 cw(c2519.68,2924.13) 2598.43,2924.13 ; 2598.52,2924.06 2599.57,76.76
Mechanical 18:
  lines w7.28: 386.56,2012.7 2200.29,2012.7 2200.29,2345.42 386.56,2345.42 386.56,2012.7